# Altium PCB Nam_PCB2.PcbDoc
Units mm, origin at the board's own origin, x right, y up, seen from the top; angles counter-clockwise.
Board outline 90.67 x 59.05 mm, 2 copper layers (Top Layer, Bottom Layer); 24 components, 10 nets, 154 pads, 0 vias.
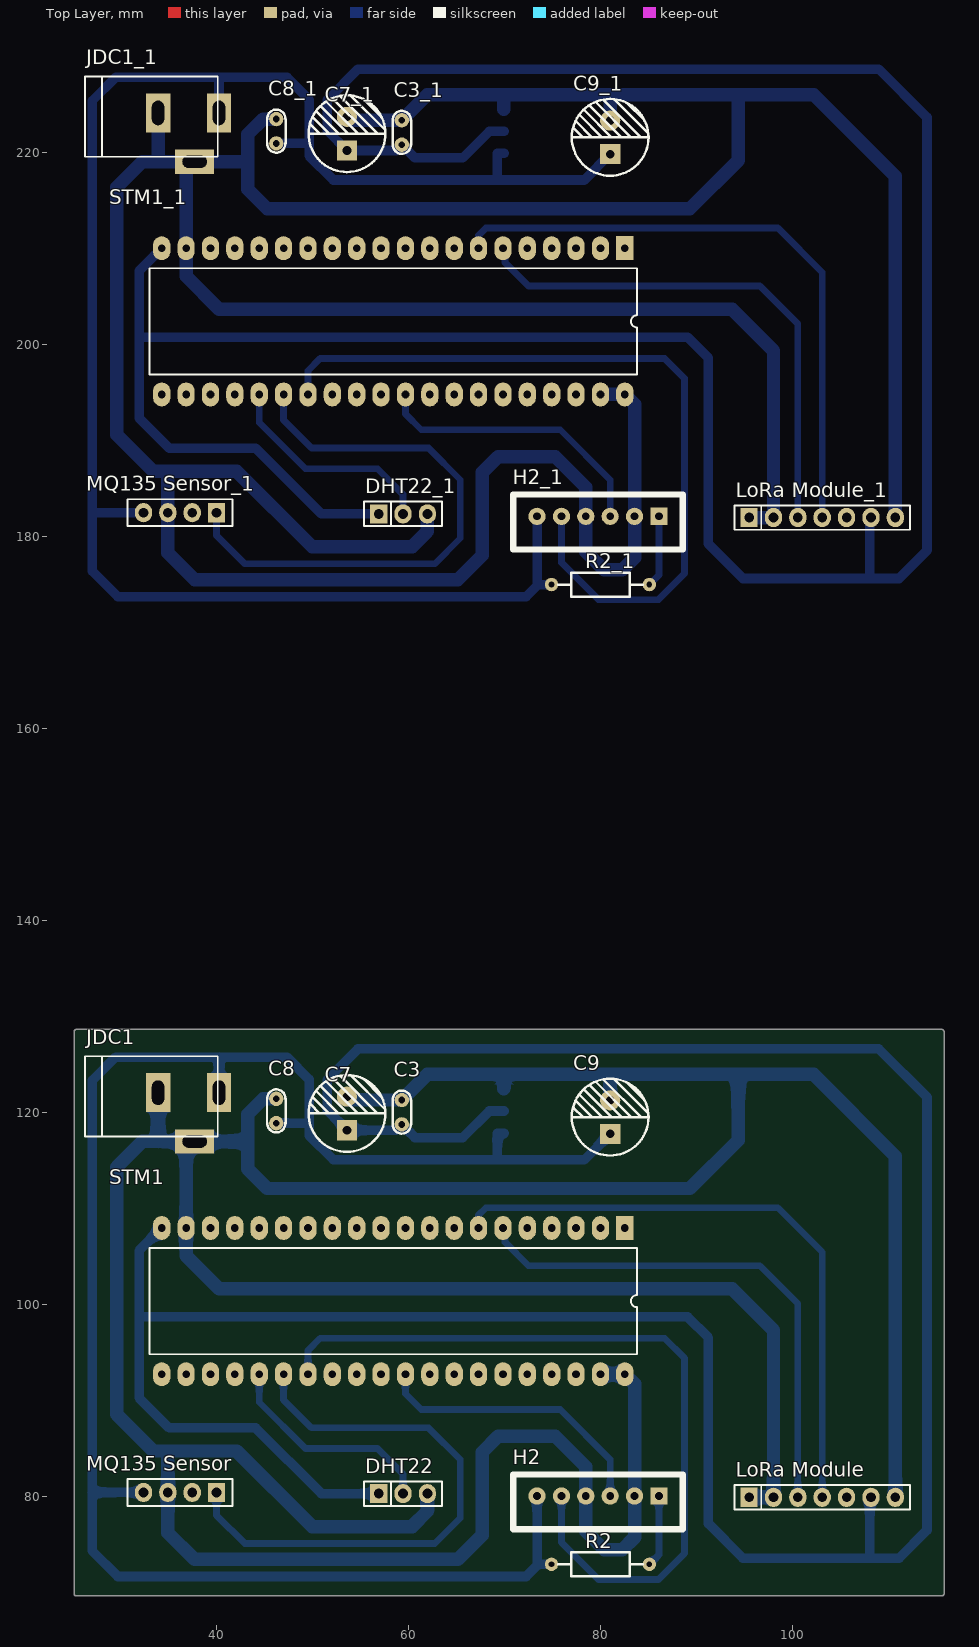
[diagram p0: Top Layer view]
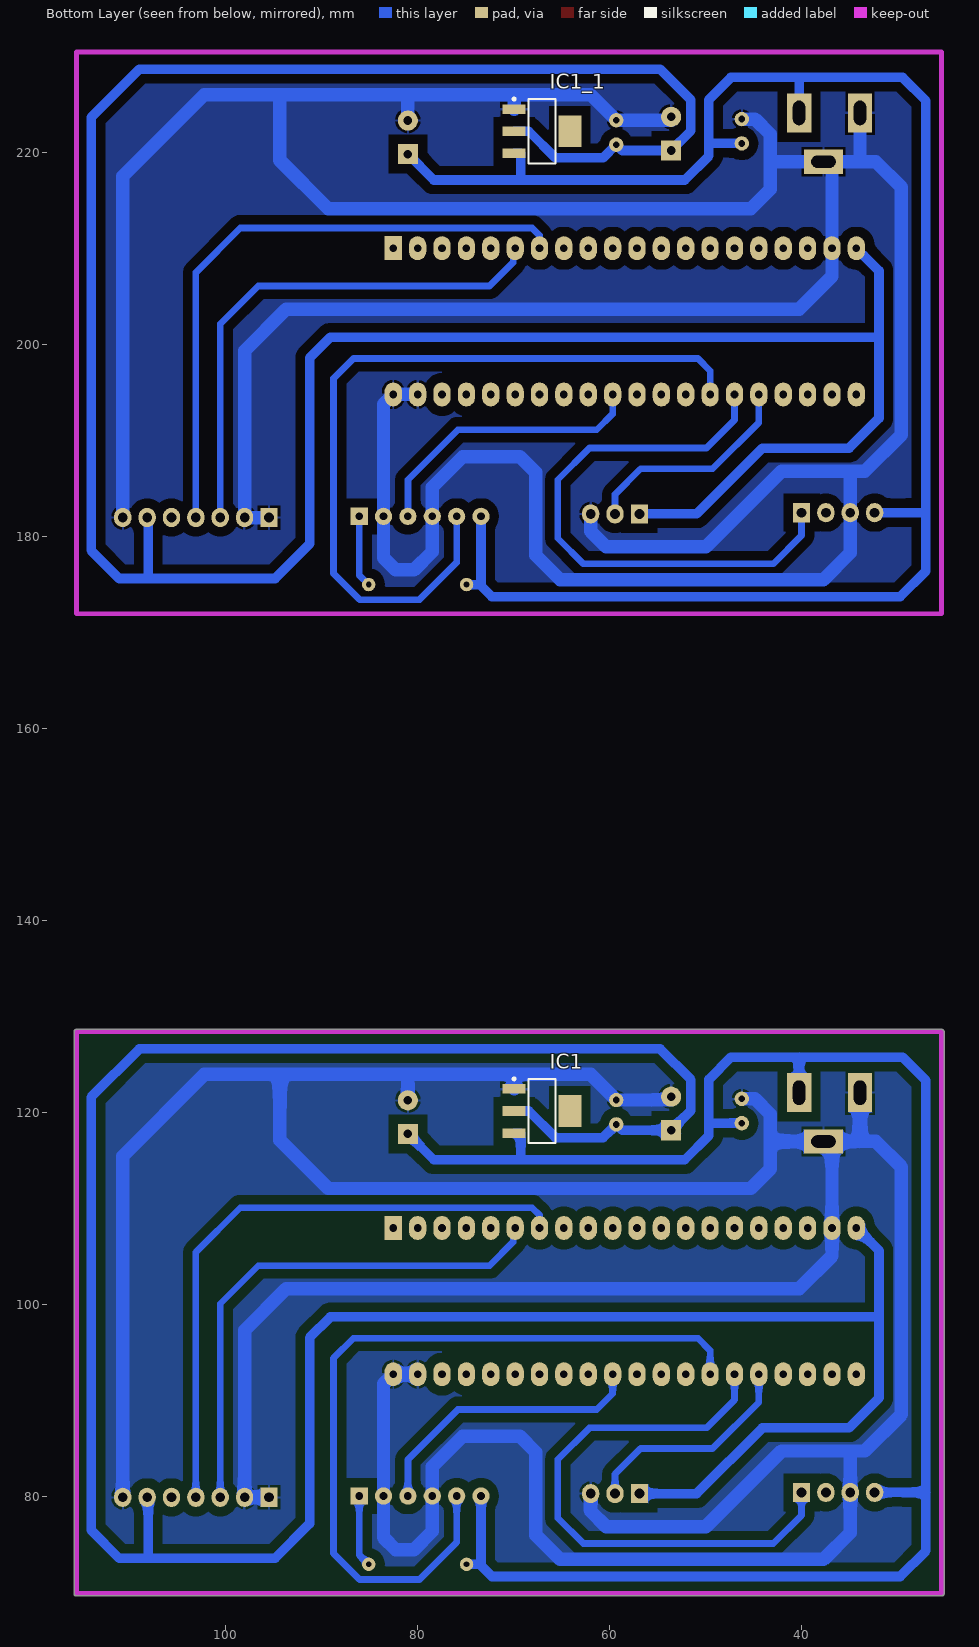
[diagram p1: Bottom Layer view, seen from below]

## Layer stack, top to bottom
Top Solder: solder mask 0.0102, Solder Resist, Dk 3.5
Top Layer: signal copper 0.0356
Dielectric 1: dielectric 0.32, FR-4, Dk 4.8
Bottom Layer: signal copper 0.0356
Bottom Solder: solder mask 0.0102, Solder Resist, Dk 3.5

## Board outline
25.4,69.6 cw(c25.4,69.85) 25.15,69.85 25.15,128.397 cw(c25.4,128.397) 25.4,128.647 115.57,128.647 cw(c115.57,128.397) 115.82,128.397 115.82,69.85 cw(c115.57,69.85) 115.57,69.6

## Design rules (kind name [scope] priority, off if disabled: settings)
Clearance [All] p1: gap=1 ignorepadtopadclearanceinfootprint=FALSE
PolygonConnect [All] p1: connectstyle=Relief reliefconductorwidth=0.254 reliefentries=4 polygonreliefangle="90 Angle" airgapwidth=0.254
RoutingLayers [All] p1: top layer_v5=FALSE bottom layer_v5=TRUE
RoutingVias [All] p1: holewidth=0.711 width=1.27 viastyle="Through Hole" minholewidth=0.711 minwidth=1.27 maxholewidth=0.711 maxwidth=1.27
SolderMaskExpansion [All] p1: expansion=0.102
Width gnd [InNet('GND')] p1: maxlimit=1.4 minlimit=1.4 preferedwidth=1.4
Width 3v3 [InNet('VCC3V3')] p2: maxlimit=1 minlimit=1 preferedwidth=1
Width 5v [InNet('5V')] p3: maxlimit=1 minlimit=1 preferedwidth=1
Width net [InNetClass('All Nets')] p4: maxlimit=0.7 minlimit=0.7 preferedwidth=0.7
29 further rules are at their usual default settings.

## Classes and differential pairs
component class Tunng_Sheet2: C3 C7 C8 C9 DHT22 H2 IC1 JDC1 "LoRa Module" "MQ135 Sensor" R2 STM1

## Components (designator, comment, footprint, x,y, rotation, side; value= is the part's Value field where it differs from the comment)
C3 "104" "tu gom" 59.309,120.015 r270 top
C3_1 "104" "tu gom" 59.309,222.123 r270 top (schematic designator C3)
C7 "10uF" "Tu hoa 8mm" 53.594,119.888 r90 top
C7_1 "10uF" "Tu hoa 8mm" 53.594,221.996 r90 top (schematic designator C7)
C8 "104" "tu gom" 46.228,120.142 r270 top
C8_1 "104" "tu gom" 46.228,222.25 r270 top (schematic designator C8)
C9 "220uF" "Tu hoa 8mm" 81.026,119.507 r90 top
C9_1 "220uF" "Tu hoa 8mm" 81.026,221.615 r90 top (schematic designator C9)
DHT22 "DHT22" "JP 1x3 CT" 56.896,80.264 r0 top
DHT22_1 "DHT22" "JP 1x3 CT" 56.896,182.372 r0 top (schematic designator DHT22)
H2 "PM 2.5 Sensor" XH2.54M-6 86.106,80.01 r180 top
H2_1 "PM 2.5 Sensor" XH2.54M-6 86.106,182.118 r180 top (schematic designator H2)
IC1 "LM1117-3V3" SOT223-4N 67.056,120.142 r180 bottom value=LM317
IC1_1 "LM1117-3V3" SOT223-4N 67.056,222.25 r180 bottom value=LM317 (schematic designator IC1)
JDC1 "Vin" DC-IN 37.084,119.507 r0 top value="Jac DC"
JDC1_1 "Vin" DC-IN 37.084,221.615 r0 top value="Jac DC" (schematic designator JDC1)
"LoRa Module" "LoRa Module" "JP 1x7 CT" 95.504,79.883 r0 top
"LoRa Module_1" "LoRa Module" "JP 1x7 CT" 95.504,181.991 r0 top (schematic designator "LoRa Module")
"MQ135 Sensor" "MQ135 Sensor" MQ2-MODULE 36.195,80.391 r180 top
"MQ135 Sensor_1" "MQ135 Sensor" MQ2-MODULE 36.195,182.499 r180 top (schematic designator "MQ135 Sensor")
R2 "150R" "tro vach 1/4w" 80.01,72.898 r0 top
R2_1 "150R" "tro vach 1/4w" 80.01,175.006 r0 top (schematic designator R2)
STM1 "KIT STM32F103C8T6" "STM32F103 KIT" 82.55,107.95 r270 top
STM1_1 "KIT STM32F103C8T6" "STM32F103 KIT" 82.55,210.058 r270 top (schematic designator STM1)

## Footprints (in the part's own frame and the unit in brackets; to place one, negate y for a bottom-side part, rotate by r counter-clockwise, add the part's x,y. Pads: shape width x height; smd on the part's side, far side on the other; paste and mask are expansions set on the pad)
DC-IN [mil] "Jac DC input"
  rect 100x160 hole 50 slot 100 at 90 deg: 1(125,100) 2(-125,100)
  rect 160x100 hole 50 slot 100 at 0 deg: 3(25,-100)
  silkscreen extent -425,-80 120,250, body extent -410,-105 134,269, height 434
"JP 1x3 CT" [mm]
  rect 1.8x2 hole 1.02: 1(0,0)
  oval 1.8x2 hole 1.02: 2(2.54,0) 3(5.08,0)
  silkscreen extent -1.52,-1.27 6.6,1.27, body extent -1.52,-1.25 6.6,1.25, height 8.51
"JP 1x7 CT" [mm] "7 row, straight, gold plating"
  rect 1.8x2 hole 1: 1(0,0)
  oval 1.8x2 hole 1: 2(2.54,0) 3(5.08,0) 4(7.62,0) 5(10.16,0) 6(12.7,0) 7(15.24,0)
  silkscreen extent -1.52,-1.27 16.76,1.27, body extent -1.52,-1.25 16.76,1.25, height 8.51
MQ2-MODULE [mm]
  rect 1.8x2 hole 1.02: 1(-3.81,0)
  oval 1.8x2 hole 1.02: 2(-1.27,0) 3(1.27,0) 4(3.81,0)
  silkscreen extent -5.46,-1.4 5.46,1.4, body extent -10,-1.25 10,21.46, height 38
SOT223-4N [mm] "SOT223, 4-Leads, Body 6.5x3.5mm, Pitch 2.3mm, Lead Span 7mm, IPC Medium Density"
  rect 2.4x1 smd: 1(-2.9,2.3) 2(-2.9,0) 3(-2.9,-2.3)
  rect 2.4x3.3 smd: 4(2.9,0)
  silkscreen extent -3.03,-3.35 1.4,3.47, body extent -3.39,-3.27 3.5,3.23, height 1.72
"STM32F103 KIT" [mm]
  rect 2.5x1.8 hole 0.8: 1(0,0)
  oval 2.5x1.8 hole 0.8: 2(0,-2.54) 3(0,-5.08) 4(0,-7.62) 5(0,-10.16) 6(0,-12.7) 7(0,-15.24) 8(0,-17.78) 9(0,-20.32) 10(0,-22.86) 11(0,-25.4) 12(0,-27.94) 13(0,-30.48) 14(0,-33.02) 15(0,-35.56) 16(0,-38.1) 17(0,-40.64) 18(0,-43.18) 19(0,-45.72) 20(0,-48.26) 21(15.24,-48.26) 22(15.24,-45.72) 23(15.24,-43.18) 24(15.24,-40.64) 25(15.24,-38.1) 26(15.24,-35.56) 27(15.24,-33.02) 28(15.24,-30.48) 29(15.24,-27.94) 30(15.24,-25.4) 31(15.24,-22.86) 32(15.24,-20.32) 33(15.24,-17.78) 34(15.24,-15.24) 35(15.24,-12.7) 36(15.24,-10.16) 37(15.24,-7.62) 38(15.24,-5.08) 39(15.24,-2.54) 40(15.24,0)
  silkscreen extent 2.08,-49.53 13.16,1.27, body extent -3.81,-53.97 19.05,3.59, height 16.12
"tro vach 1/4w" [mm]
  round 1.4 hole 0.6: 1(-5.1,0) 2(5.1,0)
  silkscreen extent -4.39,-1.25 4.42,1.25, body extent -5.38,-1.2 5.38,1.2, height 2.41
"tu gom" [mm] "Tu gom mini"
  round 1.5 hole 0.7: 1(-1.27,0) 2(1.27,0)
  silkscreen extent -2.25,-0.97 2.22,0.97, body extent -2.92,-0.85 2.92,0.85, height 6.12
"Tu hoa 8mm" [mm]
  rect 2.1x2.1 hole 0.9: 1(-1.75,0)
  round 2.1 hole 0.9: 2(1.75,0)
  silkscreen extent -4,-4 4,4, body extent -4.1,-4.07 4.1,4.13, height 13.81
XH2.54M-6 [mm]
  rect 1.8x1.8 hole 0.8: 1(0,0)
  round 1.8 hole 0.8: 2(2.54,0) 3(5.08,0) 4(7.62,0) 5(10.16,0) 6(12.7,0)
  silkscreen extent -2.48,-2.26 15.18,3.46, body extent -2.48,-2.26 15.18,3.48, height 6.91

## Part data
C3 C3_1 C8 C8_1: library part "Tu gom 104 50V", "C?m", Chung_Loai=C?m, Don_Vi=Con, Ma_Hang=MH004761, So_Chan=2, Ten_Linh_Kien="T? g?m 104 100nF 50V"
C7 C7_1 C9 C9_1: library part "Tu Hoa 220uF 25V 8x10", "C?m", Chung_Loai=C?m, Don_Vi=Con, Ma_Hang=MH006864, So_Chan=2, Ten_Linh_Kien="T? Hóa 220uF 25V 8x10MM"
DHT22 DHT22_1: library part "JP 1x3 2.54 Cai Thang", "C?m", Chung_Loai=C?m, Don_Vi=Con, Ma_Hang=MH004006, Ten_Linh_Kien="Jump Ðon Cái 2.54MM 1x20P Th?ng"
H2 H2_1: library part "Header 6P 2.54 Duc Thang", "C?m", Chung_Loai=C?m, Don_Vi=Con, Ma_Hang=MH001972, Ten_Linh_Kien="Header 6P XH2.54-6P Ð?c Th?ng"
IC1 IC1_1: library part LM1117, "Available in 1.8V, 2.5V, 2.85V, 3.3V, 5V, and  Adjustable Versions"
JDC1 JDC1_1: library part DCIN, "Jac DC input"
"LoRa Module" "LoRa Module_1": library part "JP 1x7 2.54 Cai Thang", "C?m", Chung_Loai=C?m, Don_Vi=Con, Ma_Hang=MH004006, Ten_Linh_Kien="Jump Ðon Cái 2.54MM 1x20P Th?ng"
"MQ135 Sensor" "MQ135 Sensor_1": library part MQ2-MOD, Manufacturer="W¨¹rth Elektronik eiSos GmbH", partNo=613004143121, ComponentLink1 Description=Manufacturer, ComponentLink1URL=http://www.we-online.com, ComponentLink2 Description=Datasheet, ComponentLink2URL=http://katalog.we-online.de/em/datasheet/6130xx143121.pdf, Created by="Karrer Zheng", Created Date="29 March 2013", NoPins=04
R2 R2_1: library part "Tro Vach 1/4W 5% 510R", "C?m", Chung_Loai=C?m, Don_Vi=Con, Ma_Hang=MH007325, So_Chan=2, Ten_Linh_Kien="Tr? V?ch 1/4w 5% 510R"
STM1 STM1_1: library part "STM32f103 Bluepill", "KIT STM32F103C8T6 Bluepill"

## Nets (pads, with @x,y where several pads share a name; then routed paths per layer and width w, separated by ;. In a path a pad name is that pad's centre, name@x,y a point inside that pad or via, vN(x,y) a via of type N, cw(c..) or ccw(c..) an arc to the next point about the centre after c; other vN are vias at no path point)
5V: "MQ135 Sensor.4" C8.2 C9.1 H2.6 IC1.3 JDC1.1 R2.1 | length 185.4
  Bottom Layer w1: 32.385,80.391 27.051,80.391 ; JDC1.1 40.259,125.75 ; C8.2 49.53,118.872 49.657,118.745 ; 69.266,115.316 69.266,117.842 IC1.3 ; H2.6 73.406,72.771 ; R2.1 73.533,72.898 73.406,72.771 ; C9.1 78.331,115.062 52.172,115.062 49.657,117.577 49.657,118.745 ; 27.051,80.391 27.051,123.317 29.484,125.75 40.259,125.75 ; 27.051,80.391 27.051,74.295 29.718,71.628 72.263,71.628 73.406,72.771 ; 40.259,125.75 47.351,125.75 49.657,123.444 49.657,118.745
A0: DHT22.2 STM1.25 | length 23
  Bottom Layer w0.7: STM1.25 44.45,89.789 49.276,84.963 56.769,84.963 59.436,82.296 DHT22.2
A1: "MQ135 Sensor.1" STM1.26 | length 59.9
  Bottom Layer w0.7: 40.005,80.391 40.005,78.003 42.951,75.057 62.738,75.057 65.405,77.724 65.405,83.82 62.103,87.122 49.911,87.122 46.99,90.043 STM1.26
A2: H2.5 STM1.27 | length 83.8
  Bottom Layer w0.7: STM1.27 49.53,95.185 50.8,96.455 86.706,96.455 88.773,94.389 88.773,74.041 86.055,71.323 79.807,71.323 75.946,75.184 H2.5
A6: H2.3 STM1.31 | length 30
  Bottom Layer w0.7: STM1.31 59.69,90.678 61.341,89.027 75.819,89.027 81.026,83.82 H2.3
GND: "LoRa Module.1" "LoRa Module.2" "LoRa Module.7" "MQ135 Sensor.3" C3.1 C7.2 C8.1 C9.2 DHT22.3 H2.2 H2.4 IC1.1 JDC1.2 JDC1.3 STM1.19 STM1.39 STM1.40 | length 451.8
  Bottom Layer w1.4: JDC1.2 33.909,116.967 ; 34.925,84.582 34.925,80.391 34.925,76.2 37.719,73.406 65.151,73.406 67.691,75.946 67.691,84.582 69.342,86.233 75.311,86.233 78.486,83.058 H2.4 78.486,76.327 80.391,74.422 82.296,74.422 83.566,75.692 H2.2 83.566,91.694 STM1.40 STM1.39 ; C8.1 44.856,121.412 43.256,119.812 43.256,116.967 ; C7.2 53.594,121.285 C3.1 61.976,123.952 69.956,123.952 ; DHT22.3 61.976,78.435 60.376,76.835 49.962,76.835 42.088,84.709 33.401,84.709 29.591,88.519 29.591,114.3 32.258,116.967 33.909,116.967 ; IC1.1 69.956,123.952 ; C9.2 81.026,123.698 80.772,123.952 ; 95.504,79.883 98.044,79.883 98.044,97.282 93.726,101.6 40.259,101.6 36.83,105.029 STM1.19 JDC1.3@36.83,116.967 ; 110.744,79.883 110.744,115.443 102.235,123.952 94.361,123.952 ; 33.909,116.967 JDC1.3@36.83,116.967 ; JDC1.3@36.83,116.967 JDC1.3 43.256,116.967 ; 43.256,116.967 43.256,114.097 45.288,112.065 89.332,112.065 94.361,117.094 94.361,123.952 ; 69.956,123.952 80.772,123.952 ; 80.772,123.952 94.361,123.952
NetH2_1: H2.1 R2.2 | length 7.5
  Bottom Layer w0.7: R2.2 86.106,73.894 H2.1
Rx: "LoRa Module.4" STM1.7 | length 64.9
  Bottom Layer w0.7: STM1.7 67.31,109.296 68.072,110.058 98.501,110.058 103.124,105.435 103.124,79.883
Tx: "LoRa Module.3" STM1.6 | length 54.9
  Bottom Layer w0.7: STM1.6 70.06,107.74 70.06,106.47 72.517,104.013 96.622,104.013 100.584,100.051 100.584,79.883
VCC3V3: "LoRa Module.6" C3.2 C7.1 DHT22.1 IC1.2 STM1.20 | length 294.2
  Bottom Layer w1: 32.131,98.679 89.103,98.679 91.262,96.52 91.262,77.14 94.869,73.533 111.125,73.533 114.046,76.454 114.046,121.59 109.017,126.619 54.737,126.619 51.537,123.419 51.537,120.195 C7.1 58.702,118.138 C3.2 60.681,117.373 65.659,117.373 68.428,120.142 IC1.2 ; STM1.20 34.29,107.816 33.674,107.2 33.54,107.2 31.928,105.588 31.928,90.246 35.052,87.122 44.069,87.122 50.927,80.264 DHT22.1 ; 108.077,74.041 108.077,79.756 108.204,79.883
pads on no net: "LoRa Module.5" "LoRa Module_1.1" "LoRa Module_1.2" "LoRa Module_1.3" "LoRa Module_1.4" "LoRa Module_1.5" "LoRa Module_1.6" "LoRa Module_1.7" "MQ135 Sensor.2" "MQ135 Sensor_1.1" "MQ135 Sensor_1.2" "MQ135 Sensor_1.3" "MQ135 Sensor_1.4" C3_1.1 C3_1.2 C7_1.1 C7_1.2 C8_1.1 C8_1.2 C9_1.1 C9_1.2 DHT22_1.1 DHT22_1.2 DHT22_1.3 H2_1.1 H2_1.2 H2_1.3 H2_1.4 H2_1.5 H2_1.6 IC1.4 IC1_1.1 IC1_1.2 IC1_1.3 IC1_1.4 JDC1_1.1 JDC1_1.2 JDC1_1.3 R2_1.1 R2_1.2 STM1.1 STM1.2 STM1.3 STM1.4 STM1.5 STM1.8 STM1.9 STM1.10 STM1.11 STM1.12 STM1.13 STM1.14 STM1.15 STM1.16 STM1.17 STM1.18 STM1.21 STM1.22 STM1.23 STM1.24 STM1.28 STM1.29 STM1.30 STM1.32 STM1.33 STM1.34 STM1.35 STM1.36 STM1.37 STM1.38 STM1_1.1 STM1_1.2 STM1_1.3 STM1_1.4 STM1_1.5 STM1_1.6 STM1_1.7 STM1_1.8 STM1_1.9 STM1_1.10 STM1_1.11 STM1_1.12 STM1_1.13 STM1_1.14 STM1_1.15 STM1_1.16 STM1_1.17 STM1_1.18 STM1_1.19 STM1_1.20 STM1_1.21 STM1_1.22 STM1_1.23 STM1_1.24 STM1_1.25 STM1_1.26 STM1_1.27 STM1_1.28 STM1_1.29 STM1_1.30 STM1_1.31 STM1_1.32 STM1_1.33 STM1_1.34 STM1_1.35 STM1_1.36 STM1_1.37 STM1_1.38 STM1_1.39 STM1_1.40
copper on no net: | length 1255.5
  Bottom Layer w0.7: 40.005,182.499 40.005,180.111 42.951,177.165 62.738,177.165 65.405,179.832 65.405,185.928 62.103,189.23 49.911,189.23 46.99,192.151 46.99,194.818 ; 44.45,194.818 44.45,191.897 49.276,187.071 56.769,187.071 59.436,184.404 59.436,182.372 ; 49.53,194.818 49.53,197.293 50.8,198.563 86.706,198.563 88.773,196.497 88.773,176.149 86.055,173.431 79.807,173.431 75.946,177.292 75.946,182.118 ; 59.69,194.818 59.69,192.786 61.341,191.135 75.819,191.135 81.026,185.928 81.026,182.118 ; 67.31,210.058 67.31,211.404 68.072,212.166 98.501,212.166 103.124,207.543 103.124,181.991 ; 69.85,210.058 70.06,209.848 70.06,208.578 72.517,206.121 96.622,206.121 100.584,202.159 100.584,181.991 ; 85.11,175.006 86.106,176.002 86.106,182.118
  Bottom Layer w1: 32.131,200.787 89.103,200.787 91.262,198.628 91.262,179.248 94.869,175.641 111.125,175.641 114.046,178.562 114.046,223.698 109.017,228.727 54.737,228.727 51.537,225.527 51.537,222.303 53.594,220.246 58.702,220.246 59.309,220.853 60.681,219.481 65.659,219.481 68.428,222.25 69.956,222.25 ; 32.385,182.499 27.051,182.499 ; 34.29,210.058 34.29,209.924 33.674,209.308 33.54,209.308 31.928,207.696 31.928,192.354 35.052,189.23 44.069,189.23 50.927,182.372 56.896,182.372 ; 40.259,224.155 40.259,227.858 ; 46.228,220.98 49.53,220.98 49.657,220.853 ; 69.266,217.424 69.266,219.95 69.956,219.95 ; 73.406,182.118 73.406,174.879 ; 74.91,175.006 73.533,175.006 73.406,174.879 ; 81.026,219.865 78.331,217.17 52.172,217.17 49.657,219.685 49.657,220.853 ; 108.077,176.149 108.077,181.864 108.204,181.991 ; 27.051,182.499 27.051,176.403 29.718,173.736 72.263,173.736 73.406,174.879 ; 27.051,182.499 27.051,225.425 29.484,227.858 40.259,227.858 ; 40.259,227.858 47.351,227.858 49.657,225.552 49.657,220.853
  Bottom Layer w1.4: 33.909,224.155 33.909,219.075 ; 34.925,186.69 34.925,182.499 34.925,178.308 37.719,175.514 65.151,175.514 67.691,178.054 67.691,186.69 69.342,188.341 75.311,188.341 78.486,185.166 78.486,182.118 78.486,178.435 80.391,176.53 82.296,176.53 83.566,177.8 83.566,182.118 83.566,193.802 82.55,194.818 80.01,194.818 ; 46.228,223.52 44.856,223.52 43.256,221.92 43.256,219.075 ; 53.594,223.746 53.594,223.393 59.309,223.393 61.976,226.06 69.956,226.06 ; 61.976,182.372 61.976,180.543 60.376,178.943 49.962,178.943 42.088,186.817 33.401,186.817 29.591,190.627 29.591,216.408 32.258,219.075 33.909,219.075 ; 69.956,224.55 69.956,226.06 ; 81.026,223.365 81.026,225.806 80.772,226.06 ; 95.504,181.991 98.044,181.991 98.044,199.39 93.726,203.708 40.259,203.708 36.83,207.137 36.83,210.058 36.83,219.075 ; 110.744,181.991 110.744,217.551 102.235,226.06 94.361,226.06 ; 33.909,219.075 36.83,219.075 ; 36.83,219.075 37.719,219.075 43.256,219.075 ; 43.256,219.075 43.256,216.205 45.288,214.173 89.332,214.173 94.361,219.202 94.361,226.06 ; 69.956,226.06 80.772,226.06 ; 80.772,226.06 94.361,226.06

## Polygon pours and split planes (outlines as drawn)
no net on Bottom Layer "Top Layer-No Net" (solid, remove dead copper, pour order 2): 25.4,230.505 115.57,230.505 115.57,171.958 25.4,171.958
GND on Bottom Layer "Top Layer-No Net" (solid, remove dead copper, pour order 0): 25.4,128.397 115.57,128.397 115.57,69.85 25.4,69.85

## Keep-outs
Bottom Layer:
  lines w0.5: 25.4,69.85 25.4,128.397 115.57,128.397 115.57,69.85 113.665,69.85 25.4,69.85 ; 25.4,171.958 113.665,171.958 115.57,171.958 115.57,230.505 25.4,230.505 25.4,171.958